# Altium PCB MTCH9010_Sensors.PcbDoc
Units mm, origin at the board's own origin, x right, y up, seen from the top; angles counter-clockwise.
Board outline 37 x 60 mm, 2 copper layers (Top Layer, Bottom Layer), stack 1.57 mm thick; 8 components, 4 nets, 20 pads, 0 vias.
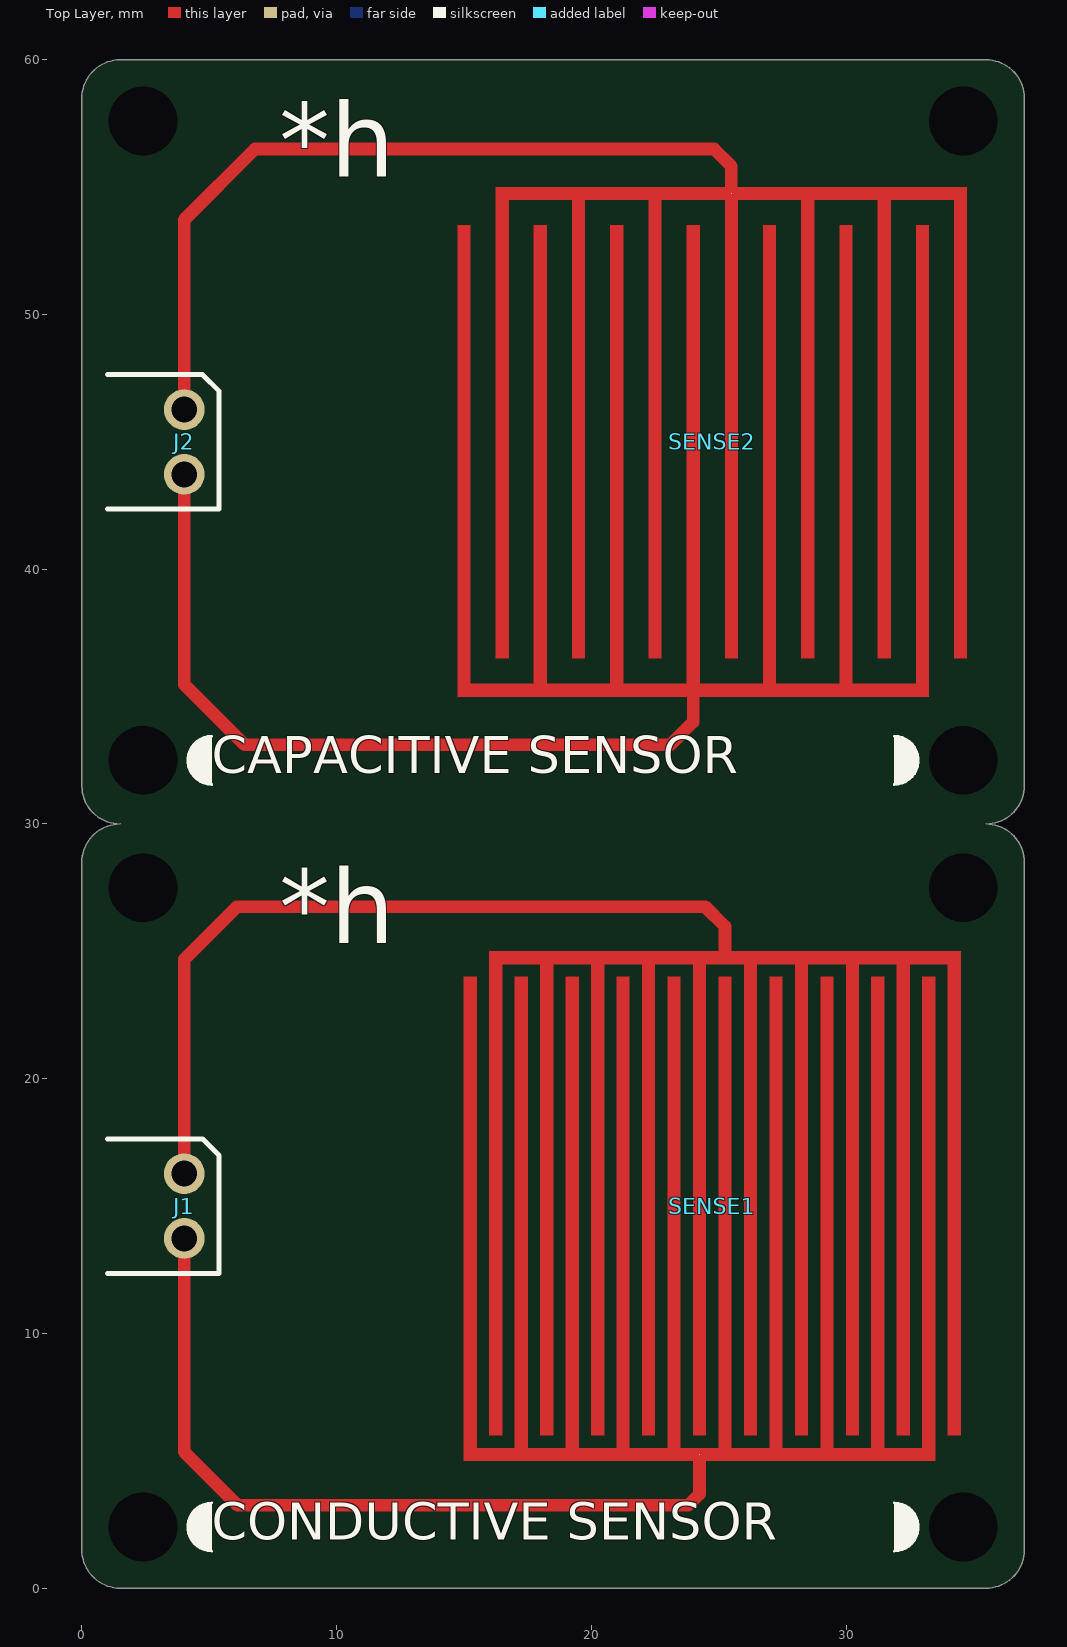
[diagram p0: Top Layer view]
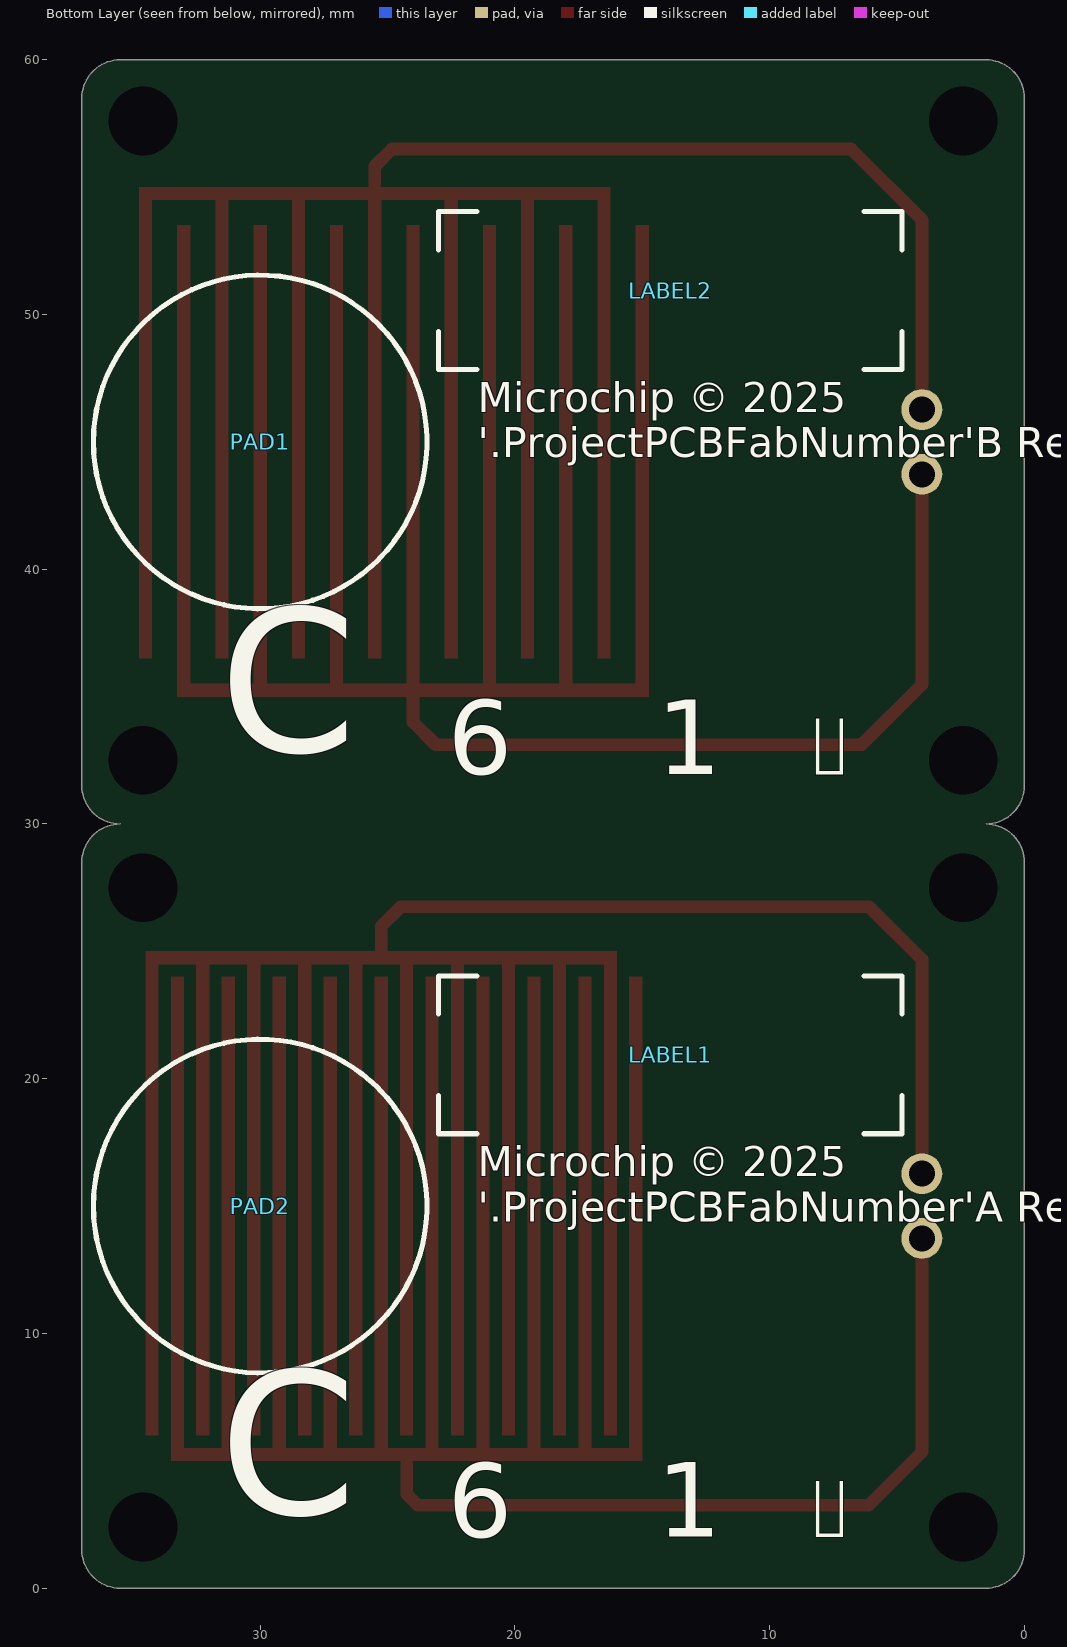
[diagram p1: Bottom Layer view, seen from below]

## Layer stack, top to bottom
Top Solder: solder mask 0.01, Solder Resist, Dk 3.5
Top Layer: signal copper 0.035
Dielectric2: core 1.5, FR-4, Dk 4.8
Bottom Layer: signal copper 0.035
Bottom Solder: solder mask 0.01, Solder Resist, Dk 3.5

## Board outline
0,1.5 0,28.5 cw(c1.5,28.5) 1.5,30 cw(c1.5,31.5) 0,31.5 0,58.5 cw(c1.5,58.5) 1.5,60 35.5,60 cw(c35.5,58.5) 37,58.5 37,31.5 cw(c35.5,31.5) 35.5,30 cw(c35.5,28.5) 37,28.5 37,1.5 cw(c35.5,1.5) 35.5,0 1.5,0 cw(c1.5,1.5)

## Design rules (kind name [scope] priority, off if disabled: settings)
AcuteAngle [All] p1: minimum=8.00000000000000E+0001 checktracksonly=FALSE
AssemblyTestPointUsage [All] p1: valid=2 allowmultiple=TRUE
AssemblyTestpoint CNANO_Testpoints [HasCompParameterValue('MCHP-ID','CON2115') Or HasCompParameterValue('MCHP-ID','CON2119') Or HasCompParameterValue('MCHP-ID','CON2120')] p1: testpointundercomponent=TRUE minsize=0.8 maxsize=2.54 preferedsize=0.8 minholesize=0 maxholesize=1.27 preferedholesize=0.25 testpointgrid=0.025 usegrid=FALSE gridtolerance=0 allowsidebottom=TRUE minspacing=1.27
AssemblyTestpoint [All] p2: testpointundercomponent=FALSE minsize=0.8 maxsize=2.54 preferedsize=0.8 minholesize=0 maxholesize=1.27 preferedholesize=0.25 testpointgrid=0.025 usegrid=FALSE gridtolerance=0 allowsidebottom=TRUE minspacing=1.27 compbodyclearance=1.27
BoardOutlineClearance BoardOutlineClearance_edge_connector [InComponent('J100')] p1: gap=0 ignorepadtopadclearanceinfootprint=FALSE
BoardOutlineClearance BoardOutlineClearance_LAYERNAME [IsText and (X1 >= 100) and (Y1 <= -60)] p2: gap=0 ignorepadtopadclearanceinfootprint=FALSE
BoardOutlineClearance [All] p3: gap=0.25 ignorepadtopadclearanceinfootprint=FALSE
Clearance Clearance_Poly_Impedance [IsRegion vs InDifferentialPairClass('All Differential Pairs')] p1: gap=0.6 ignorepadtopadclearanceinfootprint=FALSE
Clearance Clearance_Poly [InPoly] p2: gap=0.2 ignorepadtopadclearanceinfootprint=FALSE
Clearance [All] p3: gap=0.15 ignorepadtopadclearanceinfootprint=FALSE except(0.3: Arc-Hole Track-Hole SMDPad-Hole THPad-Hole Via-Hole Fill-Hole Poly-Hole Region-Hole Text-Hole)
ComponentClearance [All] p1: gap=0.254 collisioncheckmode=3 verticalgap=0.254 showdistances=TRUE donotcheckwithout3dbody=TRUE
DiffPairsRouting [All] p1: maxlimit=0.22 minlimit=0.22 mostfreqgap=0.22 toplayer_minwidth=0.16 toplayer_maxwidth=0.16 toplayer_prefwidth=0.16 bottomlayer_minwidth=0.16 bottomlayer_maxwidth=0.16 bottomlayer_prefwidth=0.16 maxuncoupledlength=5
FabricationTestPointUsage TestPointUsage [All] p1 off: valid=2 allowmultiple=TRUE
FabricationTestpoint Testpoint [All] p1 off: side=2 testpointundercomponent=TRUE minsize=0.8 maxsize=2.54 preferedsize=0.8 minholesize=0 maxholesize=1.27 preferedholesize=0.25 testpointgrid=0 allowsidebottom=TRUE usegrid=FALSE gridtolerance=0 minspacing=1.27
HoleSize [All] p1: absolutevalues=TRUE maxlimit=6.2 minlimit=0.2 maxpercent=80.000 minpercent=20.000
HoleToHoleClearance [All] p1: gap=0.3 allowstackedmicrovias=FALSE
MinimumAnnularRing [All] p1: minimumring=0.15
MinimumSolderMaskSliver LevelShifters [HasCompParameterValue('MCHP-ID','IC1665')] p1: minsoldermaskwidth=0.075
MinimumSolderMaskSliver [All] p2: minsoldermaskwidth=0.08
NetAntennae [Not IsTestpoint] p1: netantennaetolerance=0
PlaneClearance [All] p1: clearance=0.3
PlaneConnect PlaneConnect_MountingHoles [HasPad('TP200-1') OR HasPad('TP201-1')] p1: planeconnectstyle=Direct reliefexpansion=0.508 reliefentries=4 reliefconductorwidth=0.254 reliefairgap=0.254
PlaneConnect [All] p2: pad.planeconnectstyle=Relief pad.reliefexpansion=0.25 pad.reliefentries=4 pad.reliefconductorwidth=0.25 pad.reliefairgap=0.25 via.planeconnectstyle=Direct via.reliefexpansion=0.508 via.reliefentries=4 via.reliefconductorwidth=0.254 via.reliefairgap=0.254
PolygonConnect PolygonConnect_Special [HasPad('TP200-1') OR HasPad('TP201-1') OR HasPad('TP203-1')] p1: connectstyle=Direct reliefconductorwidth=0.254 reliefentries=4 polygonreliefangle="90 Angle" airgapwidth=0.254
PolygonConnect [All] p2: thpad.connectstyle=Relief thpad.reliefconductorwidth=0.254 thpad.reliefentries=4 thpad.polygonreliefangle="90 Angle" thpad.airgapwidth=0.2 smdpad.connectstyle=Relief smdpad.reliefconductorwidth=0.254 smdpad.reliefentries=4 smdpad.polygonreliefangle="90 Angle" smdpad.airgapwidth=0.2 via.connectstyle=Direct via.reliefconductorwidth=0.254 via.reliefentries=4 via.polygonreliefangle="90 Angle" via.airgapwidth=0.2
RoutingVias [All] p1: holewidth=0.25 width=0.55 viastyle="Through Hole" minholewidth=0.2 minwidth=0.5 maxholewidth=0.5 maxwidth=1
SMDNeckDown [All] p1: percent=98.000
SilkToSilkClearance SilkToSilkClearance_Text [IsText] p1: silktosilkclearance=0
SilkToSilkClearance [All] p2: silktosilkclearance=0.1
SilkToSolderMaskClearance SilkscreenOverComponentPads_Soldermask [All] p1: minsilkscreentomaskgap=0.12 clearancetoexposedcopper=FALSE
SilkToSolderMaskClearance SilkscreenOverComponentPads_Copper [All] p2: minsilkscreentomaskgap=0.2 clearancetoexposedcopper=TRUE
SolderMaskExpansion SolderMaskTenting [IsVia AND NOT (IsFabTestpoint OR IsAssyTestpoint)] p1: expansion=-1 istentingtop=FALSE
SolderMaskExpansion [All] p2: expansion=0.06 istentingtop=FALSE
UnRoutedNet [All] p1: checkbadconnections=TRUE
ViasUnderSMD ViasUnderSMD_Testpoint [HasPad('TP202-1') OR HasPad('U200-7')] p1: allowed=TRUE
ViasUnderSMD [All] p2: allowed=FALSE
Width [All] p1: maxlimit=10 minlimit=0.125 preferedwidth=0.15 minimp=50.000000 maximp=50.000000 favimp=50.000000
15 further rules are at their usual default settings.

## Components (designator, comment, footprint, x,y, rotation, side; value= is the part's Value field where it differs from the comment)
J1 "Header 1x2" HDR_M_2.54_1X2_U_TH-PIP_RA_WCON_1125-1102S0R140CR01 4.02,15 r270 top locked value="HDR-2.54 Male 1x2"
J2 "Header 1x2" HDR_M_2.54_1X2_U_TH-PIP_RA_WCON_1125-1102S0R140CR01 4.02,45 r270 top locked value="HDR-2.54 Male 1x2"
LABEL1 "08-10015" 08-10015 13.894,20.94 r180 bottom value="PCBA LABEL 18X6mm"
LABEL2 "08-10015" 08-10015 13.894,50.94 r180 bottom value="PCBA LABEL 18X6mm"
PAD1 "Rubber Pad Cylindrical Taper" BUMP_BUMPERSPECIALTIES_BS06GR10X20RP_CYLINDRICAL_BLACK_D12.7H6.35 30,45 r180 bottom locked value="RUBBER PAD D12.7H6.35mm"
PAD2 "Rubber Pad Cylindrical Taper" BUMP_BUMPERSPECIALTIES_BS06GR10X20RP_CYLINDRICAL_BLACK_D12.7H6.35 30,15 r180 bottom locked value="RUBBER PAD D12.7H6.35mm"
SENSE1 "Liquid_Sensor" Con_20x20x0.5x0.5 24.75,15 r0 top locked
SENSE2 "Liquid_Sensor" Cap_20x20x1x0.5 24.75,45 r0 top locked

## Footprints (in the part's own frame and the unit in brackets; to place one, negate y for a bottom-side part, rotate by r counter-clockwise, add the part's x,y. Pads: shape width x height; smd on the part's side, far side on the other; paste and mask are expansions set on the pad)
08-10015 [mm]
  silkscreen extent -9.1,-3.1 9.1,3.1, body extent -9,-3 9,3, height 0.1
BUMP_BUMPERSPECIALTIES_BS06GR10X20RP_CYLINDRICAL_BLACK_D12.7H6.35 [mm]
  silkscreen extent -6.55,-6.55 6.55,6.55, body extent -6.35,-6.35 6.35,6.35, height 6.35
Cap_20x20x1x0.5 [mm]
  round 0.025 smd paste-2539.97 mask-1: 1(0.75,9.75) 2(-0.75,-9.75)
  Top Layer region: 10,-8.5 9.5,-8.5 9.5,-8.5 9.5,9.5 7,9.5 7,-8.5 6.5,-8.5 6.5,-8.5 6.5,9.5 4,9.5 4,-8.5 3.5,-8.5 3.5,-8.5 3.5,9.5 1,9.5 1,-8.5 0.5,-8.5 0.5,-8.5 0.5,9.5 -2,9.5 -2,9.5 -2,-8.5 -2.5,-8.5 -2.5,-8.5 -2.5,9.5 -5,9.5 -5,-8.5 -5.5,-8.5 -5.5,-8.5 -5.5,9.5 -8,9.5 -8,-8.5 -8.5,-8.5 -8.5,10 10,10
  Top Layer region: -10,8.5 -9.5,8.5 -9.5,8.5 -9.5,-9.5 -7,-9.5 -7,8.5 -6.5,8.5 -6.5,8.5 -6.5,-9.5 -4,-9.5 -4,8.5 -3.5,8.5 -3.5,8.5 -3.5,-9.5 -1,-9.5 -1,8.5 -0.5,8.5 -0.5,8.5 -0.5,-9.5 2,-9.5 2,-9.5 2,8.5 2.5,8.5 2.5,8.5 2.5,-9.5 5,-9.5 5,8.5 5.5,8.5 5.5,8.5 5.5,-9.5 8,-9.5 8,8.5 8.5,8.5 8.5,-10 -10,-10
Con_20x20x0.5x0.5 [mm]
  round 0.025 smd paste-2539.97: 1(0.5,9.75) 2(-0.5,-9.75)
  Top Layer region: -9.25,-9.5 -9.25,9 -9.75,9 -9.75,-10 8.75,-10 8.75,9 8.25,9 8.25,-9.5 6.75,-9.5 6.75,9 6.25,9 6.25,-9.5 4.75,-9.5 4.75,9 4.25,9 4.25,-9.5 2.75,-9.5 2.75,9 2.25,9 2.25,-9.5 0.75,-9.5 0.75,9 0.25,9 0.25,-9.5 -1.25,-9.5 -1.25,9 -1.75,9 -1.75,-9.5 -3.25,-9.5 -3.25,9 -3.75,9 -3.75,-9.5 -5.25,-9.5 -5.25,9 -5.75,9 -5.75,-9.5 -7.25,-9.5 -7.25,9 -7.75,9 -7.75,-9.5
  Top Layer region: -8.75,-9 -8.25,-9 -8.25,9.5 -6.75,9.5 -6.75,-9 -6.25,-9 -6.25,9.5 -4.75,9.5 -4.75,-9 -4.25,-9 -4.25,9.5 -2.75,9.5 -2.75,-9 -2.25,-9 -2.25,9.5 -0.75,9.5 -0.75,-9 -0.25,-9 -0.25,9.5 1.25,9.5 1.25,-9 1.75,-9 1.75,9.5 3.25,9.5 3.25,-9 3.75,-9 3.75,9.5 5.25,9.5 5.25,-9 5.75,-9 5.75,9.5 7.25,9.5 7.25,-9 7.75,-9 7.75,9.5 9.25,9.5 9.25,-9 9.75,-9 9.75,10 -8.75,10
HDR_M_2.54_1X2_U_TH-PIP_RA_WCON_1125-1102S0R140CR01 [mm]
  rect 1.75x1.75 on Top Paste: 0(-1.27,0) 0(1.27,0)
  round 1.6 hole 1.02: 1(-1.27,0) 2(1.27,0)
  silkscreen extent -2.64,-3.02 2.64,1.37, body extent -2.54,-9.99 2.54,0.33, height 2.55

## Part data
J1 J2: library part CON3018, Current=3A, Manufacturer 1=WCON, Manufacturer Part Number 1=1125-1102S0R140CR01, Operating Temperature="-40°C to +105°C", Voltage=1kV, Assembly Type="TH PIP", Category=Connector, Description_="CON HDR-2.54 MALE 1x2 GOLD FLASH/TIN 6.00MH TH-PIP R/A", MCHP-ID=CON3018, Populated=YES, Restricted Sourcing=No, Revision=1, Supplier 1="Cabcon A/S", Supplier Part Number 1=1125-1102S0R140CR01, Symbol="Header 1x2", Type="Header 2.54mm"
LABEL1 LABEL2: Manufacturer 1="ACT Logimark AS", Manufacturer 2="Sunrise Paper (M) Sdn Bhd", Manufacturer 3=Raynen, Manufacturer Part Number 1=505462, Manufacturer Part Number 2=037268-5, Manufacturer Part Number 3=10010407, Category=MCHP-Manufacturing, Description_="LABEL PCBA 18x6mm Datamatrix Assy# / Rev / Serial / Date", MCHP-ID=08-10015, Populated=MECH, Revision=4, Supplier 1="ACT Logimark AS", Supplier 2="Microchip Technology", Supplier 3=Raynen, Supplier Part Number 1=505462, Supplier Part Number 2=01000-004967, Supplier Part Number 3=10010407, Symbol=08-10015, Type="PCBA Label"
PAD1 PAD2: library part MECH0417, Manufacturer 1="Bumper Specialties Inc.", Manufacturer Part Number 1=BS06GR10X20RP, Supplier Part Number 1=2042-1020-ND, Category=Hardware, Description_="MECH HW RUBBER PAD Cylindrical Flat Top D12.7H6.35mm Gray", MCHP-ID=MECH0417, Populated=MECH, Revision=3, Supplier 1=Digi-Key, Symbol="Rubber Pad Cylindrical Taper", Type="Rubber Pad"

## Free pads (board coordinates)
  round 0 hole 2.7 unplated paste-2539.97: 0(2.4,2.4) 0(2.4,27.5) 0(2.4,32.5) 0(2.4,57.6) 0(34.6,2.4) 0(34.6,27.5) 0(34.6,32.5) 0(34.6,57.6)

## Nets (pads, with @x,y where several pads share a name; then routed paths per layer and width w, separated by ;. In a path a pad name is that pad's centre, name@x,y a point inside that pad or via, vN(x,y) a via of type N, cw(c..) or ccw(c..) an arc to the next point about the centre after c; other vN are vias at no path point)
CAP_INPUT: J2.2 SENSE2.2 | length 30.6
  Top Layer w0.5: J2.2 4.02,35.48 6.391,33.109 23.109,33.109 24,34 24,35
GND: J2.1 SENSE2.1 | length 31.3
  Top Layer w0.5: J2.1@4.02,46.37 4.02,53.72 6.8,56.5 24.824,56.5 25.5,55.824 25.5,55.75 SENSE2.1
SENSE_CON1: J1.1 SENSE1.1 | length 31.9
  Top Layer w0.5: J1.1 4.02,24.678 6.092,26.75 24.474,26.75 25.25,25.974 25.25,24.925
SENSE_CON2: J1.2 SENSE1.2 | length 31
  Top Layer w0.5: J1.2 4.02,5.35 6.12,3.25 23.8,3.25 24.25,3.7 24.25,5
pads on no net: J1.0 J2.0

## Keep-outs
Keep-Out Layer:
  text "'.Layer_Name'" at 174.01,-104.74 h1.5

## Other copper
Top Layer:
  text ".ProjectPCBFabRevision" at 209.188,-104.562 h1.5
  text "'.Layer_Name'" at 174.01,-104.74 h1.5
Bottom Layer:
  text ".ProjectPCBFabRevision" at 209.188,-104.562 h1.5
  text ".ProjectPCBFabRevision" at 209.188,-104.562 h1.5
  text ".ProjectPCBFabRevision" at 209.188,-104.562 h1.5
  text "'.Layer_Name'" at 174.01,-104.74 h1.5

## Silkscreen, mask and mechanical layers (free items; w line width, h text height)
Top Overlay:
  region: 5.106,1.414 cw(c5.106,2.4) 5.106,3.386
  region: 31.894,3.386 cw(c31.894,2.4) 31.894,1.414
  region: 31.894,33.486 cw(c31.894,32.5) 31.894,31.514
  region: 5.106,31.514 cw(c5.106,32.5) 5.106,33.486
  lines w0.1: 5.106,1.45 cw(c5.106,2.4) 5.106,3.35 ; 5.106,31.55 cw(c5.106,32.5) 5.106,33.45 ; 31.894,1.45 ccw(c31.894,2.4) 31.894,3.35 ; 31.894,31.55 ccw(c31.894,32.5) 31.894,33.45
  text "*h" at 7.75,54.45 h5
  text "CAPACITIVE SENSOR" at 5.106,31.5 h2.5
  text "*h" at 7.75,24.35 h5
  text "CONDUCTIVE SENSOR" at 5.106,1.4 h2.5
  text ".ProjectPCBFabRevision" at 209.188,-104.562 h1.5
  text "'.Layer_Name'" at 174.01,-104.74 h1.5
Bottom Overlay:
  text "Microchip © 2025" at 21.453,45.77 h2
  text "'.ProjectPCBFabNumber'B Rev'.ProjectPCBFabRevision'" at 21.453,43.998 h2
  text "" at 8.312,31 h5
  text "1" at 14.429,31 h5
  text "6" at 22.629,30.993 h5
  text "C" at 31.6,31 h9.7
  text "Microchip © 2025" at 21.453,15.77 h2
  text "'.ProjectPCBFabNumber'A Rev'.ProjectPCBFabRevision'" at 21.453,13.995 h2
  text "" at 8.312,1.05 h5
  text "1" at 14.429,1.05 h5
  text "6" at 22.629,1.043 h5
  text "C" at 31.6,1.05 h9.7
  text ".ProjectPCBFabRevision" at 209.188,-104.562 h1.5
  text "'.Layer_Name'" at 174.01,-104.74 h1.5
Top Paste:
  text ".ProjectPCBFabRevision" at 209.188,-104.562 h1.5
  text "'.Layer_Name'" at 174.01,-104.74 h1.5
Bottom Paste:
  text ".ProjectPCBFabRevision" at 209.188,-104.562 h1.5
  text "'.Layer_Name'" at 174.01,-104.74 h1.5
Top Solder:
  text ".ProjectPCBFabRevision" at 209.188,-104.562 h1.5
  text "'.Layer_Name'" at 174.01,-104.74 h1.5
Bottom Solder:
  text ".ProjectPCBFabRevision" at 209.188,-104.562 h1.5
  text "'.Layer_Name'" at 174.01,-104.74 h1.5
NOTES (M1):
  lines w0.1: -2.5,-2.5 39.5,-2.5 39.5,61.5 -2.5,61.5 -2.5,-2.5
  text "'.Layer_Name'" at 192.01,-104.74 h1.5
BOARD (M2):
  lines w0.1: 37,58.45 37,31.5 cw(c35.5,31.5) 35.5,30 cw(c35.5,28.5) 37,28.5 37,1.5 cw(c35.5,1.5) 35.5,0 1.5,0 cw(c1.5,1.5) 0,1.5 0,28.5 cw(c1.5,28.5) 1.5,30 cw(c1.5,31.5) 0,31.5 0,58.5 cw(c1.5,58.5) 1.5,60 35.5,60 cw(c35.5,58.5) 37,58.5
  text ".ProjectPCBFabRevision" at 209.188,-104.562 h1.5
  text "'.Layer_Name'" at 174.01,-104.74 h1.5
REF POINTS (M3):
  text "'.Layer_Name'" at 174.01,-104.74 h1.5
FAB (M4):
  text ".ProjectPCBFabRevision" at 209.188,-104.562 h1.5
  text "'.Layer_Name'" at 174.01,-104.74 h1.5
Case (M5):
  text "'.Layer_Name'" at 174.01,-104.74 h1.5
Cover (M6):
  text "'.Layer_Name'" at 174.01,-104.74 h1.5
Terminal Block (M7):
  text "'.Layer_Name'" at 174.01,-104.74 h1.5
Route Tool Path:
  text "'.Layer_Name'" at 174.01,-104.74 h1.5
V-Cut (M9):
  lines w0.3: 0,30 37,30
  text "'.Layer_Name'" at 174.01,-104.74 h1.5
Bottom Assembly:
  text "'.VariantName'" at -76.44,-88.74 h0.9
  text "ASSEMBLY VARIANT:" at -62.19,-88.74 h0.9
  text "DOCUMENT NUMBER:" at -108.44,-96.99 h1.15
  text "'.ProjectPCBAssyNumber'_ASSY-D" at -108.69,-99.99 h1.38
  text ".ProjectPCBAssyRevision" at -125.368,-104.562 h1.5
  text "'.Layer_Name'" at -90.49,-104.74 h1
Top Assembly:
  text "ASSEMBLY VARIANT:" at 146.01,-88.74 h0.9
  text "'.VariantName'" at 160.26,-88.74 h0.9
  text "DOCUMENT NUMBER:" at 192.26,-96.99 h1.15
  text "'.ProjectPCBAssyNumber'_ASSY-D" at 192.51,-99.99 h1.38
  text ".ProjectPCBAssyRevision" at 209.188,-104.562 h1.5
  text "'.Layer_Name'" at 174.01,-104.74 h1
Bottom 3D Body:
  text "'.Layer_Name'" at 174.01,-104.74 h1.15
Top 3D Body:
  text "'.Layer_Name'" at 174.01,-104.74 h1.2
Bottom Courtyard:
  text ".ProjectPCBFabRevision" at 209.188,-104.562 h1.5
  text "'.Layer_Name'" at 174.01,-104.74 h1
Top Courtyard:
  text ".ProjectPCBFabRevision" at 209.188,-104.562 h1.5
  text "'.Layer_Name'" at 174.01,-104.74 h1.1
TITLE (M16):
  lines w0.1: 145.51,-87.49 227.33,-87.49 ; 197.51,-79.99 197.51,-82.99 227.33,-82.99 ; 216.05,-104.625 216.05,-103.355 ; 216.05,-103.99 226.21,-103.99 ; 216.21,-102.79 216.21,-101.79 ; 216.21,-102.29 226.21,-102.29 ; 218.59,-104.625 218.59,-103.355 ; 221.13,-104.625 221.13,-103.355 ; 221.21,-102.59 221.21,-101.99 ; 223.67,-104.625 223.67,-103.355 ; 226.21,-104.625 226.21,-103.355 ; 226.21,-102.79 226.21,-101.79 ; 227.33,-82.99 227.33,-82.99
  lines w0.127: -148.59,-50.165 -143.51,-50.165 ; -148.59,10.16 -143.51,10.16 ; -148.59,70.485 -143.51,70.485 ; -85.09,-110.49 -85.09,-105.41 ; -85.09,125.73 -85.09,130.81 ; -21.59,-110.49 -21.59,-105.41 ; -21.59,125.73 -21.59,130.81 ; 41.91,-110.49 41.91,-105.41 ; 41.91,125.73 41.91,130.81 ; 77.47,-105.41 113.03,-105.41 ; 105.41,-110.49 105.41,-105.41 ; 105.41,125.73 105.41,130.81 ; 145.51,-105.41 145.51,-79.99 ; 145.51,-100.99 227.33,-100.99 ; 145.51,-94.99 227.33,-94.99 ; 145.51,-88.99 227.33,-88.99 ; 168.91,-110.49 168.91,-105.41 ; 168.91,125.73 168.91,130.81 ; 173.51,-105.41 173.51,-88.99 ; 191.51,-100.99 191.51,-94.99 ; 204.51,-105.41 204.51,-100.99 ; 212.01,-105.41 212.01,-94.99 ; 227.33,-74.93 227.33,-105.41 ; 227.33,-50.165 232.41,-50.165 ; 227.33,10.16 232.41,10.16 ; 227.33,70.485 232.41,70.485 ; 227.33,-105.41 227.33,-79.99 111.51,-79.99 111.51,-105.41 227.33,-105.41 ; 227.33,-105.41 -143.51,-105.41 -143.51,125.73 227.33,125.73 227.33,-105.41 ; -148.59,-110.49 232.41,-110.49 232.41,130.81 -148.59,130.81 -148.59,-110.49
  lines w0.254: 116.83,116.73 116.83,121.23 116.83,125.73 ; 129.33,116.73 129.33,121.23 129.33,125.73 ; 207.83,116.73 207.83,121.23 207.83,125.73 ; 227.33,121.23 105.83,121.23 ; 105.83,121.23 105.83,125.73 227.33,125.73 227.33,116.73 105.83,116.73 105.83,121.23
  text "1" at -117.314,127.508 h1.78
  text "2" at -53.924,127.508 h1.78
  text "3" at 9.305,127.508 h1.78
  text "4" at 72.974,127.508 h1.78
  text "5" at 136.449,127.508 h1.78
  text "6" at 200.076,127.508 h1.78
  text "REV" at 108.33,122.73 h1.52
  text "ECO" at 118.33,122.73 h1.52
  text "Comments" at 164.83,122.23 h1.52
  text "Date" at 212.83,122.23 h1.52
  text "A" at -146.685,98.476 h1.78
  text "A" at 229.235,98.476 h1.78
  text "B" at -146.685,38.024 h1.78
  text "B" at 229.235,38.024 h1.78
  text "C" at -146.685,-22.301 h1.78
  text "C" at 229.235,-22.301 h1.78
  text "PART NUMBER:" at 198.51,-81.99 h1
  text "'.ProjectpartNumber'" at 210.51,-82.24 h1.5
  text "D" at -146.685,-82.499 h1.78
  text "TITLE:" at 146.51,-82.49 h1.14
  text "D" at 229.235,-82.499 h1.78
  text "'.ProjectTitle'" at 146.51,-86.49 h2.5
  text "PCB Layout Contact:" at 146.51,-90.99 h1.15
  text "GERBER FILE:" at 174.51,-90.99 h1.15
  text ".ProjectContactPCB" at 146.51,-93.99 h1.6
  text "'.Plot_File_Name'" at 174.51,-93.99 h1.5
  text "M" at 114.51,-95.99 h15.24
  text "Project Owner:" at 146.51,-96.99 h1.15
  text "PCB NUMBER:" at 174.51,-96.99 h1.15
  text "DATE:" at 213.21,-96.99 h1.14
  text "Microchip Technology Inc." at 113.28,-99.25 h1.78
  text ".ProjectContactOwner" at 146.51,-99.99 h1.6
  text ".ProjectPCBFabNumber" at 174.51,-99.99 h1.6
  text "'.PRINT_DATE'" at 213.21,-99.99 h1.5
  text "2355 W. Chandler Blvd." at 114.51,-101.99 h1.78
  text "LAYER NAME:" at 174.51,-102.49 h1.14
  text "10mm" at 212.51,-102.59 h0.7
  text "PCB FILE NAME:" at 146.51,-102.74 h1.15
  text "REV:" at 205.26,-102.74 h1.14
  text "400mil" at 212.41,-104.29 h0.7
  text "Chandler, AZ  85224" at 115.51,-104.49 h1.78
  text "'.PCB_FILE_NAME_NO_PATH'" at 146.51,-104.74 h1
  text "1" at -117.314,-108.712 h1.78
  text "2" at -53.924,-108.712 h1.78
  text "3" at 9.305,-108.712 h1.78
  text "4" at 72.974,-108.712 h1.78
  text "5" at 136.449,-108.712 h1.78
  text "6" at 200.076,-108.712 h1.78
Drill Drawing:
  text "DOCUMENT NUMBER:" at 192.26,-96.99 h1.15
  text "'.ProjectPCBFabNumber'_FAB-D" at 192.51,-99.99 h1.38
  text ".ProjectPCBFabRevision" at 209.188,-104.562 h1.5
TITLE MIRROR (M17):
  lines w0.1: -143.51,-87.49 -61.69,-87.49 ; -142.39,-104.625 -142.39,-103.355 ; -142.39,-103.99 -132.23,-103.99 ; -142.39,-102.79 -142.39,-101.79 ; -142.39,-102.29 -132.39,-102.29 ; -139.85,-104.625 -139.85,-103.355 ; -137.39,-102.59 -137.39,-101.99 ; -137.31,-104.625 -137.31,-103.355 ; -134.77,-104.625 -134.77,-103.355 ; -132.39,-102.79 -132.39,-101.79 ; -132.23,-104.625 -132.23,-103.355 ; -113.69,-79.99 -113.69,-82.99 -143.51,-82.99 ; -143.51,-82.99 -143.51,-82.99
  lines w0.127: -148.59,-50.165 -143.51,-50.165 ; -148.59,10.16 -143.51,10.16 ; -148.59,70.485 -143.51,70.485 ; -143.51,-100.99 -61.69,-100.99 ; -143.51,-94.99 -61.69,-94.99 ; -143.51,-88.99 -61.69,-88.99 ; -128.19,-105.41 -128.19,-94.99 ; -120.69,-105.41 -120.69,-100.99 ; -107.69,-100.99 -107.69,-94.99 ; -89.69,-105.41 -89.69,-88.99 ; -85.09,-110.49 -85.09,-105.41 ; -85.09,125.73 -85.09,130.81 ; -61.69,-105.41 -61.69,-79.99 ; -21.59,-110.49 -21.59,-105.41 ; -21.59,125.73 -21.59,130.81 ; 41.91,-110.49 41.91,-105.41 ; 41.91,125.73 41.91,130.81 ; 105.41,-110.49 105.41,-105.41 ; 105.41,125.73 105.41,130.81 ; 168.91,-110.49 168.91,-105.41 ; 168.91,125.73 168.91,130.81 ; 227.33,-50.165 232.41,-50.165 ; 227.33,10.16 232.41,10.16 ; 227.33,70.485 232.41,70.485 ; -143.51,-105.41 227.33,-105.41 227.33,125.73 -143.51,125.73 -143.51,-105.41 ; -143.51,-105.41 -27.69,-105.41 -27.69,-79.99 -143.51,-79.99 -143.51,-105.41 ; -148.59,-110.49 232.41,-110.49 232.41,130.81 -148.59,130.81 -148.59,-110.49
  lines w0.254: -143.51,121.23 -22.01,121.23 ; -124.01,116.73 -124.01,121.23 -124.01,125.73 ; -45.51,116.73 -45.51,121.23 -45.51,125.73 ; -33.01,116.73 -33.01,121.23 -33.01,125.73 ; -22.01,121.23 -22.01,125.73 -143.51,125.73 -143.51,116.73 -22.01,116.73 -22.01,121.23
  text "6" at -116.256,127.508 h1.78
  text "5" at -52.629,127.508 h1.78
  text "4" at 10.846,127.508 h1.78
  text "3" at 74.515,127.508 h1.78
  text "2" at 137.744,127.508 h1.78
  text "1" at 201.134,127.508 h1.78
  text "ECO" at -34.51,122.73 h1.52
  text "REV" at -24.51,122.73 h1.52
  text "Date" at -129.01,122.23 h1.52
  text "Comments" at -81.01,122.23 h1.52
  text "A" at -145.415,98.476 h1.78
  text "A" at 230.505,98.476 h1.78
  text "B" at -145.415,38.024 h1.78
  text "B" at 230.505,38.024 h1.78
  text "C" at -145.415,-22.301 h1.78
  text "C" at 230.505,-22.301 h1.78
  text "PART NUMBER:" at -114.69,-81.99 h1
  text "'.ProjectpartNumber'" at -126.69,-82.24 h1.5
  text "D" at -145.415,-82.499 h1.78
  text "TITLE:" at -62.69,-82.49 h1.14
  text "D" at 230.505,-82.499 h1.78
  text "'.ProjectTitle'" at -62.69,-86.49 h2.5
  text "GERBER FILE:" at -90.69,-90.99 h1.15
  text "PCB Layout Contact:" at -62.69,-90.99 h1.15
  text "'.Plot_File_Name'" at -90.69,-93.99 h1.5
  text ".ProjectContactPCB" at -62.69,-93.99 h1.6
  text "M" at -30.69,-95.99 h15.24
  text "DATE:" at -129.39,-96.99 h1.14
  text "PCB NUMBER:" at -90.69,-96.99 h1.15
  text "Project Owner:" at -62.69,-96.99 h1.15
  text "Microchip Technology Inc." at -29.46,-99.25 h1.78
  text "'.PRINT_DATE'" at -129.39,-99.99 h1.5
  text ".ProjectPCBFabNumber" at -90.69,-99.99 h1.6
  text ".ProjectContactOwner" at -62.69,-99.99 h1.6
  text "2355 W. Chandler Blvd." at -30.69,-101.99 h1.78
  text "LAYER NAME:" at -90.69,-102.49 h1.14
  text "10mm" at -128.69,-102.59 h0.7
  text "REV:" at -121.44,-102.74 h1.14
  text "PCB FILE NAME:" at -62.69,-102.74 h1.15
  text "400mil" at -128.59,-104.29 h0.7
  text "Chandler, AZ  85224" at -31.69,-104.49 h1.78
  text "'.PCB_FILE_NAME_NO_PATH'" at -62.69,-104.74 h1
  text "6" at -116.256,-108.712 h1.78
  text "5" at -52.629,-108.712 h1.78
  text "4" at 10.846,-108.712 h1.78
  text "3" at 74.515,-108.712 h1.78
  text "2" at 137.744,-108.712 h1.78
  text "1" at 201.134,-108.712 h1.78

## Text inside footprints (layer, text, board x,y; h text height)
J1: Top Assembly "1" at 3.52,16.437 h1 r270
J2: Top Assembly "1" at 3.52,46.437 h1 r270
PAD1: Bottom Assembly "Rubber" at 32.411,45.889 h0.9; Bottom Assembly "Pad" at 31.27,43.222 h1
PAD2: Bottom Assembly "Rubber" at 32.686,15.889 h1; Bottom Assembly "Pad" at 31.27,13.222 h1